# Altium PCB ESP-RC-Car.fixed.PcbDoc (part 1 of 2)
Units mm, origin at the board's own origin, x right, y up, seen from the top; angles counter-clockwise.
Board outline 100.25 x 60.25 mm, 4 copper layers (Top Layer, Int1 (Signal), Int2 (GND), Bottom Layer(PWR)), stack 1.586 mm thick; 110 components, 97 nets, 403 pads, 571 vias.
Unrouted connection lines stored in the file: 3.
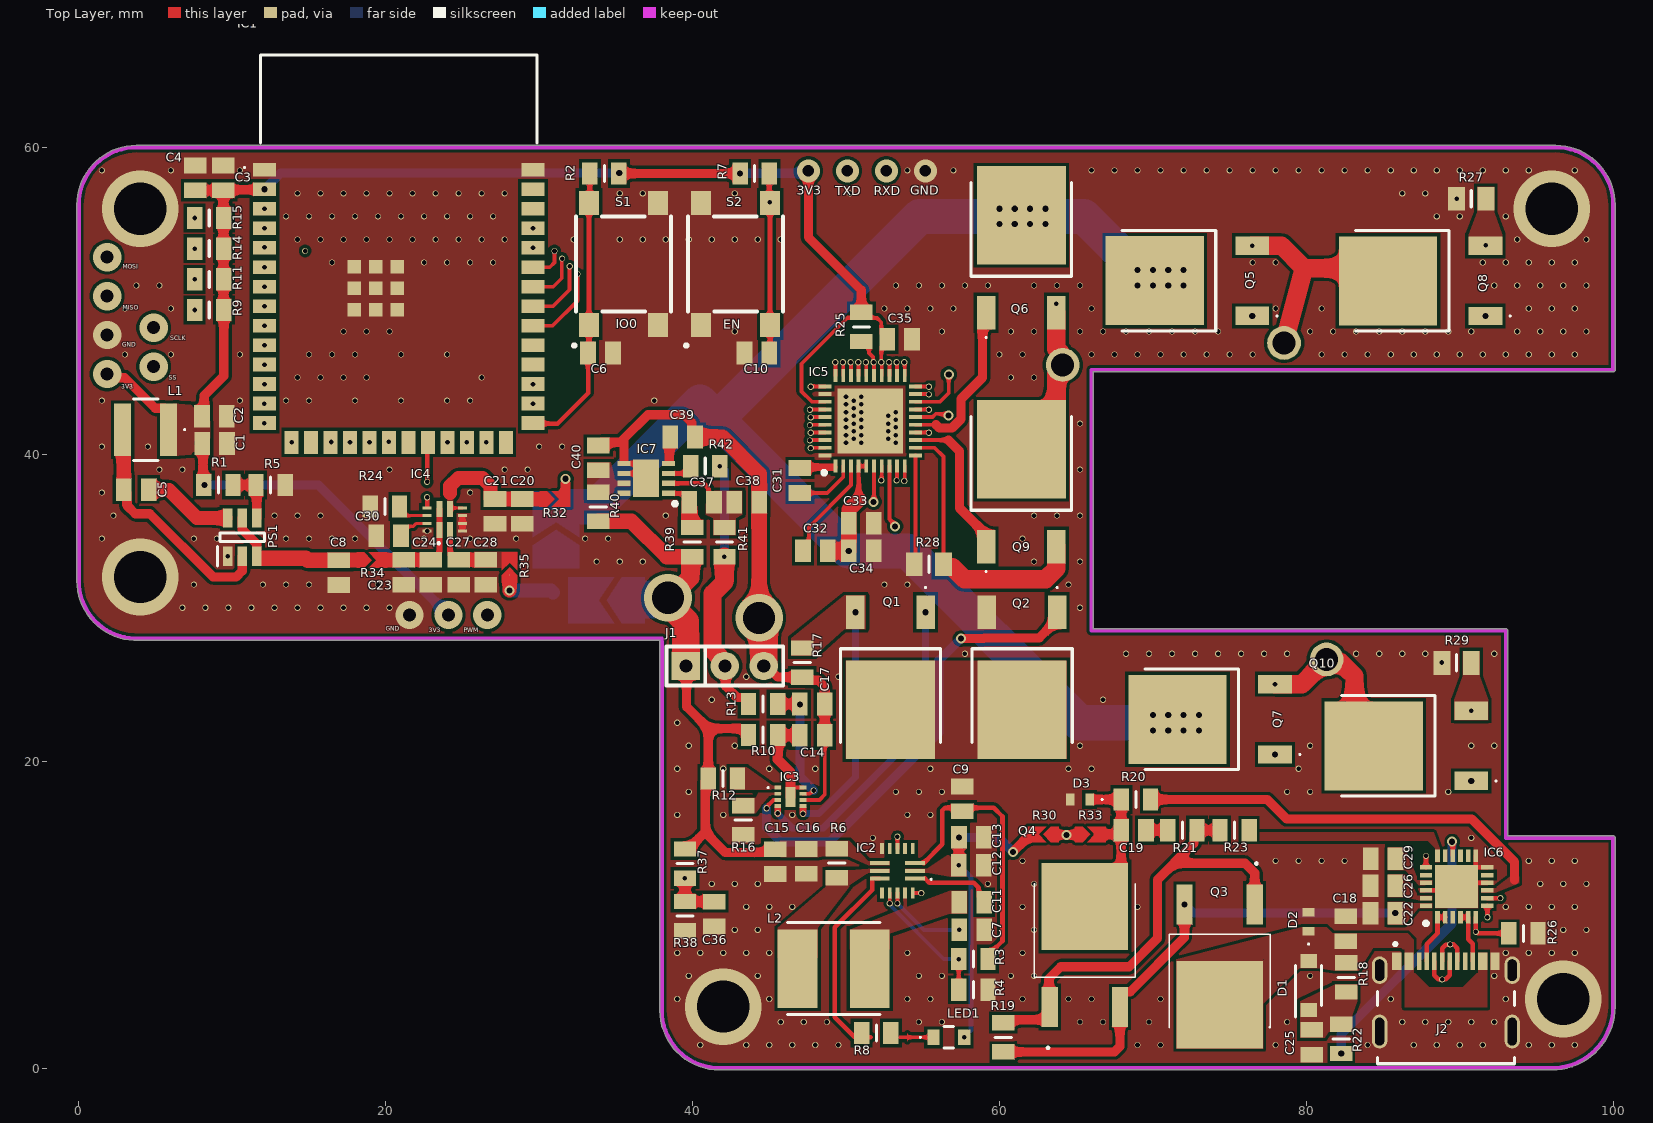
[diagram p0: Top Layer view]
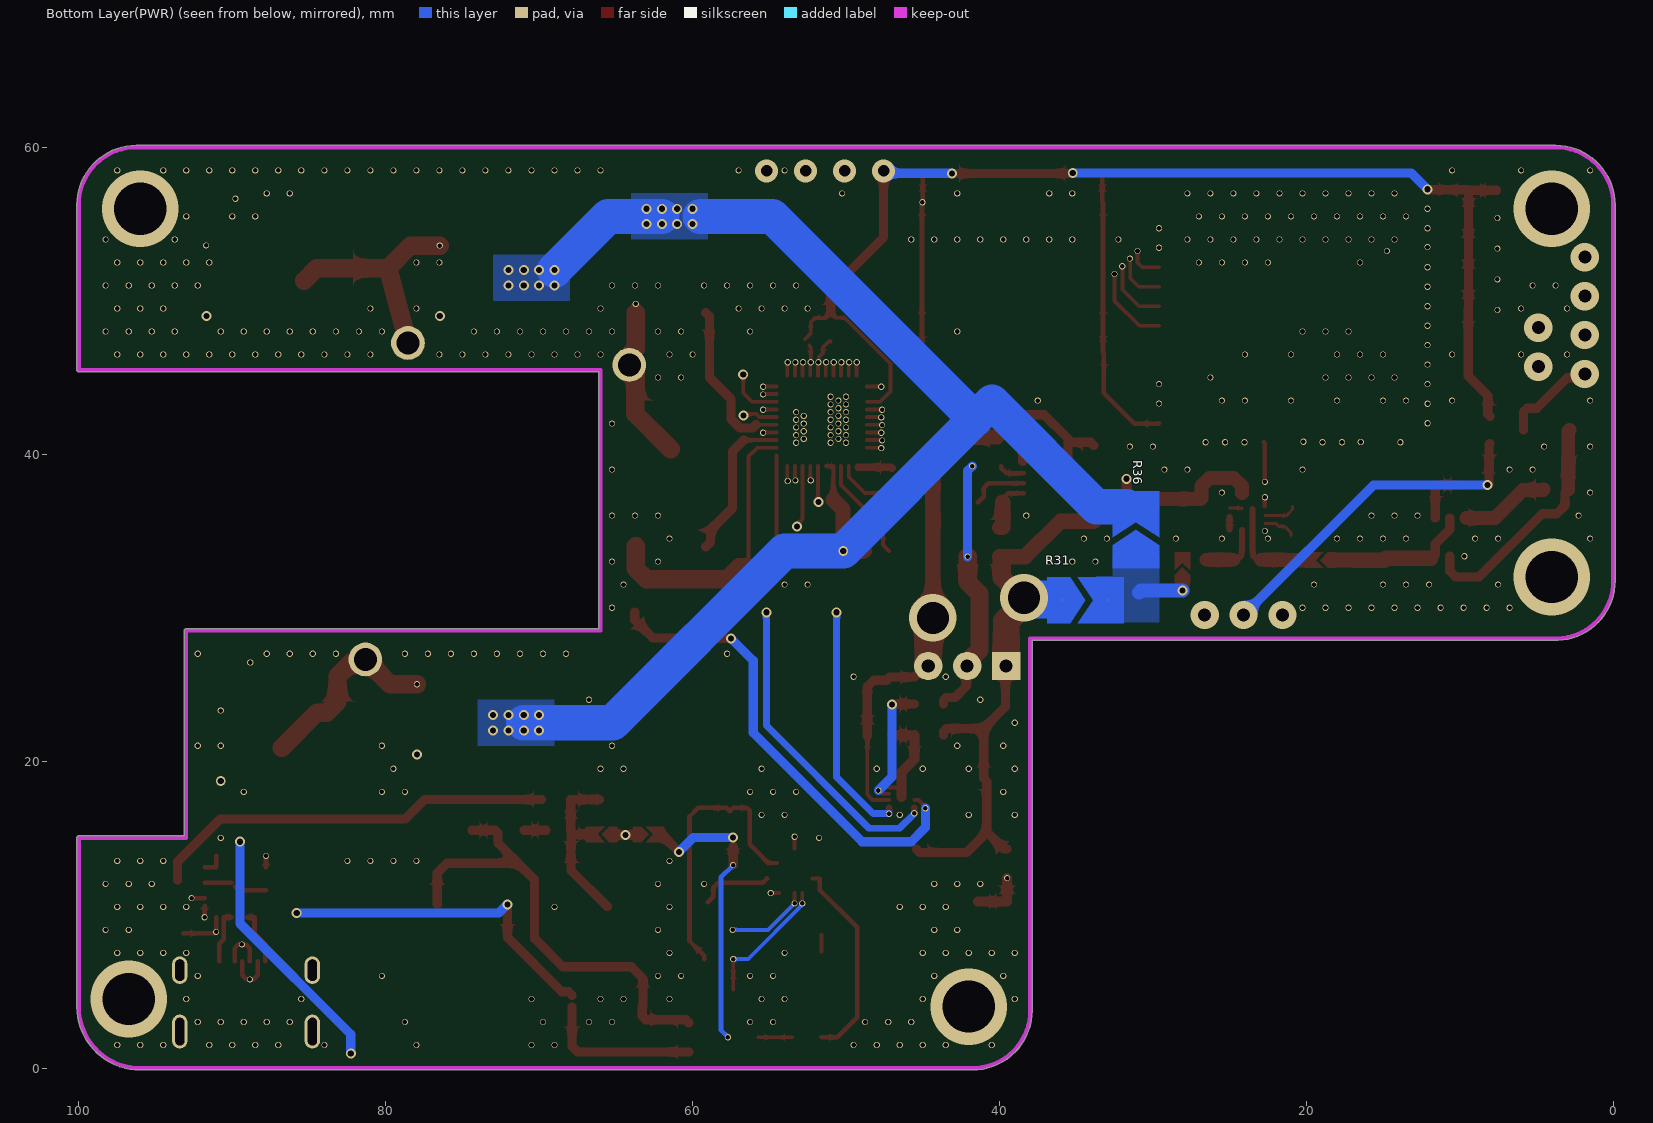
[diagram p1: Bottom Layer(PWR) view, seen from below]
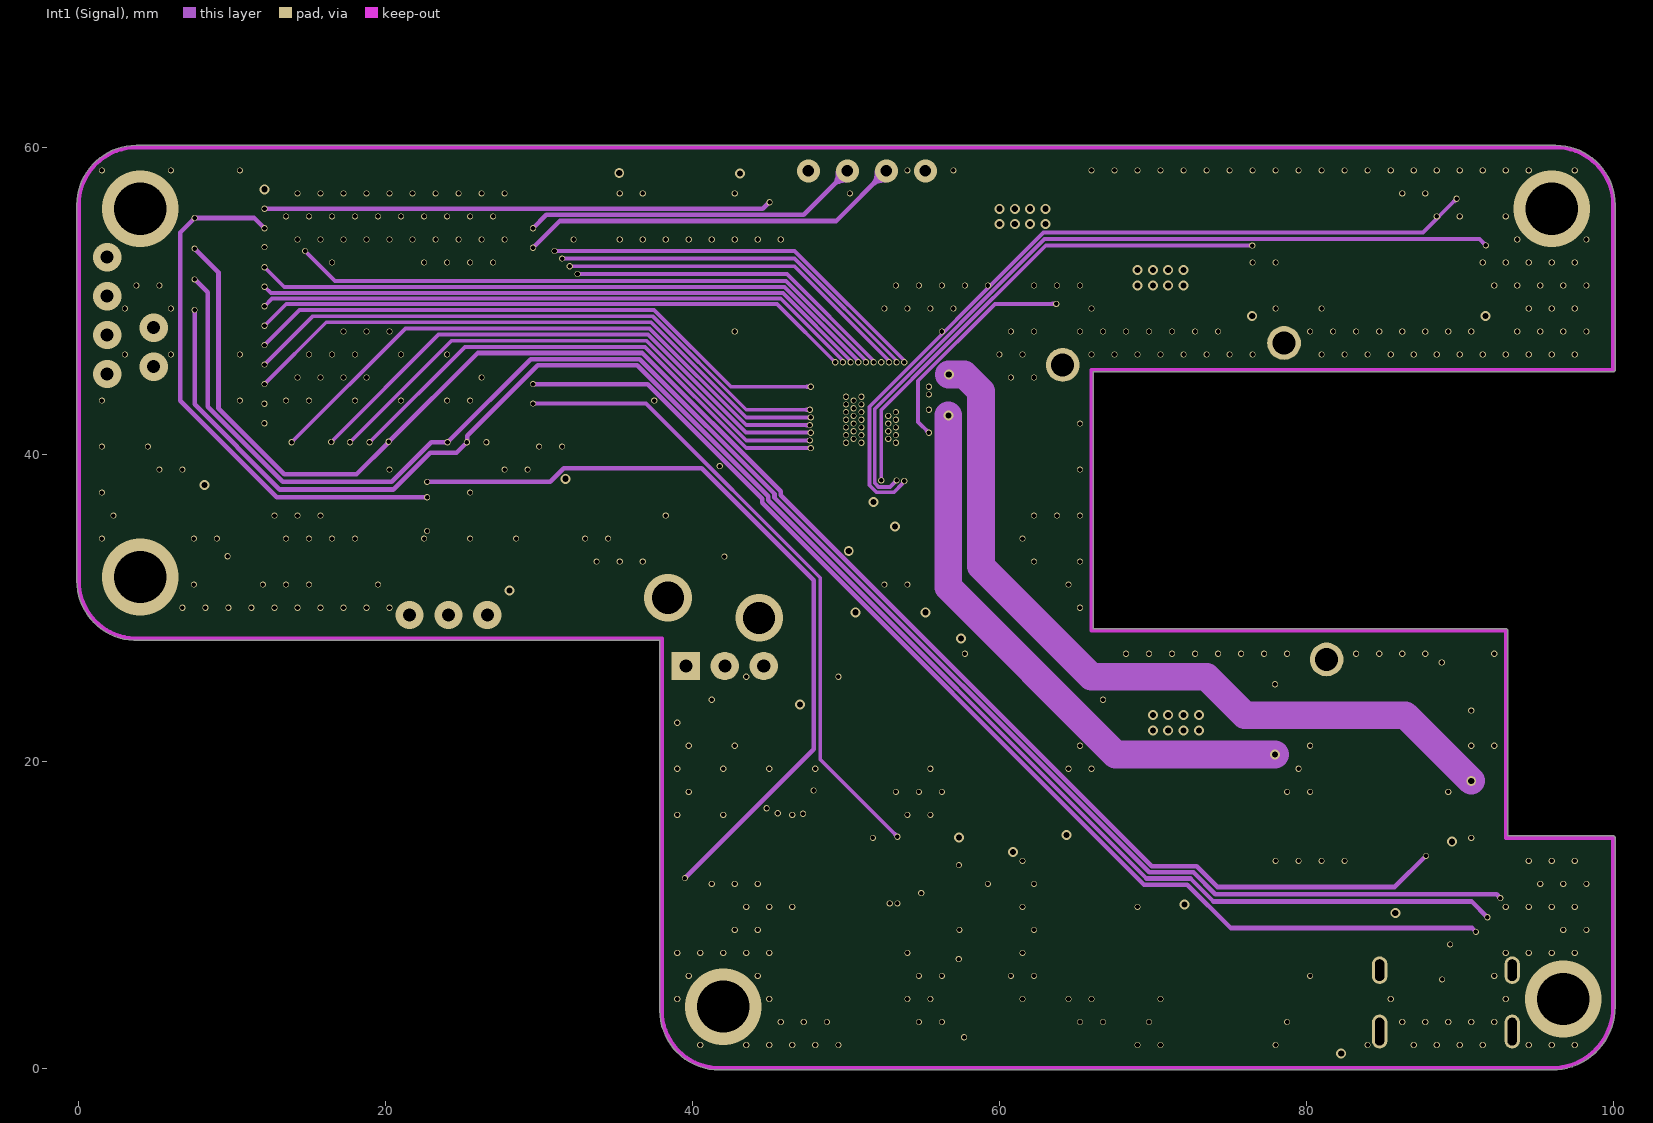
[diagram p2: Int1 (Signal)]
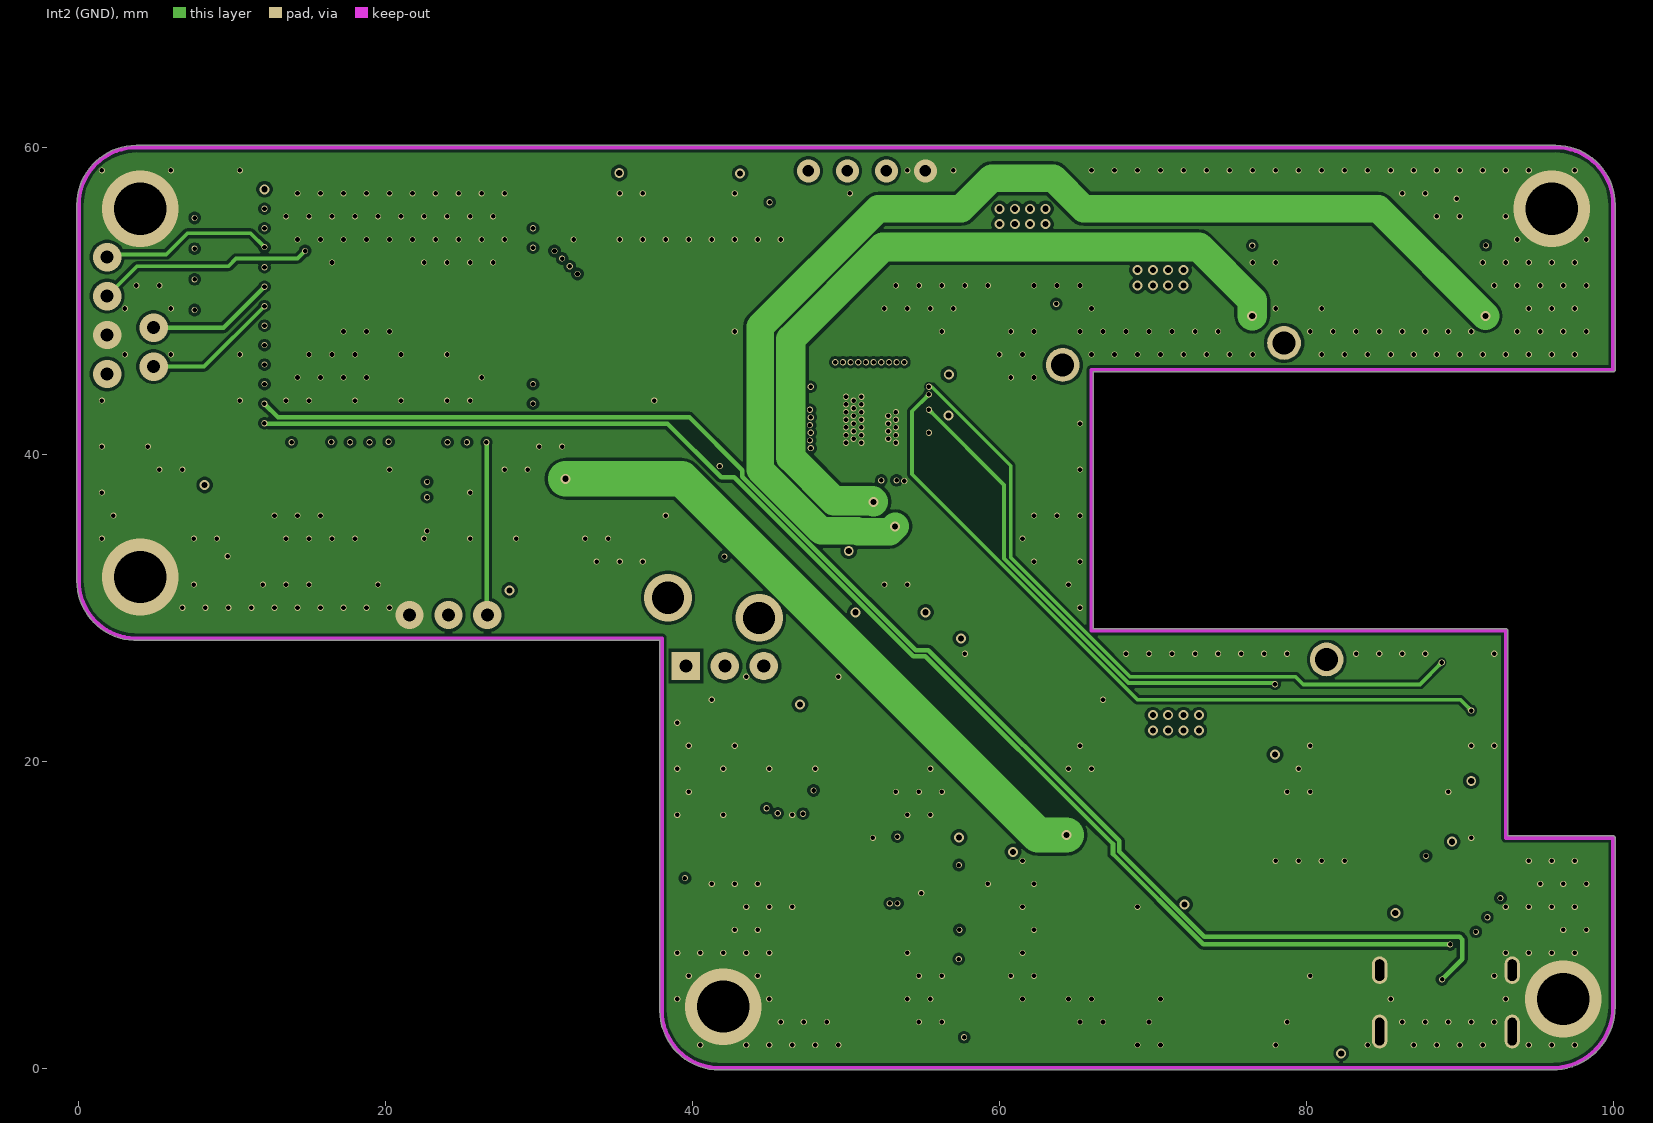
[diagram p3: Int2 (GND)]

## Layer stack, top to bottom
Top Solder: solder mask 0.0254, SM-001, Dk 4
Top Layer: signal copper 0.035
Dielectric 1: prepreg 0.2104, PP-017, Dk 4.3
Int1 (Signal): signal copper 0.0152
Dielectric 3: core 1.065, Core-039, Dk 4.8
Int2 (GND): signal copper 0.0152
Dielectric 5: prepreg 0.2104, PP-017, Dk 4.3
Bottom Layer(PWR): signal copper 0.035
Bottom Solder: solder mask 0.0254, SM-001, Dk 4

## Board outline
3.596,27.876 37.873,27.873 37.873,3.75 ccw(c41.75,3.75) 41.749,-0.127 41.75,-0.127 96,-0.127 ccw(c96,4) 100.127,4 100.127,5 100.127,15 ccw(c100,15) 100,15.127 93.127,15.127 93.127,28.5 ccw(c93,28.5) 93,28.627 66.127,28.627 66.127,45.373 100,45.373 ccw(c100,45.5) 100.127,45.5 100.127,56.25 ccw(c96.25,56.25) 96.25,60.127 3.75,60.127 ccw(c3.75,56.25) -0.127,56.25 -0.127,31.75 ccw(c3.75,31.75)

## Design rules (kind name [scope] priority, off if disabled: settings)
Clearance [All] p1: gap=0.2 ignorepadtopadclearanceinfootprint=TRUE except(0.1: Arc-Arc Arc-Track Arc-SMDPad Arc-THPad Arc-Via Arc-Text Arc-Hole Track-Track Track-SMDPad Track-THPad Track-Via Track-Text Track-Hole SMDPad-SMDPad SMDPad-THPad SMDPad-Via SMDPad-Text SMDPad-Hole THPad-THPad THPad-Via THPad-Text THPad-Hole Via-Via Via-Text Via-Hole Text-Text Text-Hole)
HoleSize [All] p1: absolutevalues=TRUE maxlimit=10 minlimit=0.025 maxpercent=80.000 minpercent=20.000
HoleToHoleClearance [All] p1: gap=0 allowstackedmicrovias=TRUE
PlaneConnect [All] p1: planeconnectstyle=Direct reliefexpansion=0.508 reliefentries=4 reliefconductorwidth=0.254 reliefairgap=0.254
PolygonConnect [All] p1: connectstyle=Direct reliefconductorwidth=0.254 reliefentries=4 polygonreliefangle="90 Angle" airgapwidth=0.254
RoutingVias [All] p1: holewidth=10 width=10 viastyle="Through Hole" minholewidth=0.3 minwidth=0.4 maxholewidth=10 maxwidth=10
SolderMaskExpansion [All] p1: expansion=0.102 istentingtop=FALSE
SupplyNets "Schematic Supply Nets_10" [InNet('VBATM')] p1: voltage=0.000
SupplyNets "Schematic Supply Nets_9" [InNet('VBAT-')] p2: voltage=0.000
SupplyNets "Schematic Supply Nets_8" [InNet('VBAT+')] p3: voltage=0.000
SupplyNets "Schematic Supply Nets_2" [InNet('VDRAIN')] p4: voltage=0.000
SupplyNets "Schematic Supply Nets_3" [InNet('VBATJ')] p5: voltage=0.000
SupplyNets "Schematic Supply Nets_7" [InNet('GND')] p6: voltage=0.000
SupplyNets "Schematic Supply Nets_6" [InNet('VMCU')] p7: voltage=0.000
SupplyNets "Schematic Supply Nets_5" [InNet('VBUS')] p8: voltage=0.000
SupplyNets "Schematic Supply Nets_4" [InNet('VSYS')] p9: voltage=0.000
SupplyNets "Schematic Supply Nets" [InNet('3V3')] p10: voltage=0.000
Width [All] p1: maxlimit=10 minlimit=0.1 preferedwidth=0.254
27 further rules are at their usual default settings.

## Components (designator, comment, footprint, x,y, rotation, side; value= is the part's Value field where it differs from the comment)
C1 "0805 22uF" CAPC2012X94N 8.85,40.7 r0 top
C2 "0805 22uF" CAPC2012X94N 8.835,42.475 r0 top
C3 "0805 10uF" CAPC2012X94N 9.4,58.01 r270 top
C4 "0805 100nF" CAPC2012X94N 7.6,58.01 r270 top
C5 "0805 0.1uF" CAPC2012X94N 3.74,37.7 r180 top
C6 "0805 10nF" CAPC2012X94N 34,46.6 r180 top
C7 "0805 1uF" CAPC2012X94N 58.2,9 r180 top
C8 "0805 2.2uF" CAPC2012X94N 16.95,32.285 r90 top
C9 "0805 1uF" CAPC2012X94N 57.575,17.535 r270 top
C10 "0805 10nF" CAPC2012X94N 44.19,46.6 r180 top
C11 "0805 10uF" CAPC2012X94N 58.19,10.8 r180 top
C12 "0805 10uF" CAPC2012X94N 58.165,13.225 r180 top
C13 "0805 10uF" CAPC2012X94N 58.175,15.025 r180 top
C14 "0805 0.1uF" CAPC2012X94N 47.8,21.675 r180 top
C15 "0805 10uF" CAPC2012X94N 45.4,13.45 r90 top
C16 "0805 10uF" CAPC2012X94N 47.4,13.46 r90 top
C17 "0805 0.1F" CAPC2012X94N 47.8,23.725 r180 top
C18 "0805 100nF" CAPC2012X94N 82.575,9.075 r90 top
C19 "0805 100nF" CAPC2012X94N 68.74,15.5 r0 top
C20 "0805 1uF" CAPC2012X94N 28.9,36.275 r270 top
C21 "0805 10uF" CAPC2012X94N 27.125,36.275 r270 top
C22 "0805 1uF" CAPC2012X94N 84.99,10.1 r0 top
C23 "0805 1uF" CAPC2012X94N 21.175,32.31 r270 top
C24 "0805 10uF" CAPC2012X94N 22.95,32.31 r270 top
C25 "0805 100nF" CAPC2012X94N 80.35,1.675 r270 top
C26 "0805 1uF" CAPC2012X94N 84.99,11.875 r180 top
C27 "0805 1uF" CAPC2012X94N 24.75,32.31 r270 top
C28 "0805 10uF" CAPC2012X94N 26.525,32.31 r270 top
C29 "0805 1uF" CAPC2012X94N 85,13.65 r0 top
C30 "0805 1uF" CAPC2012X94N 20.19,34.7 r0 top
C31 "0805 47nF" CAPC2012X94N 47,38.29 r90 top
C32 "0805 1uF" CAPC2012X94N 48.01,33.7 r180 top
C33 "0805 0.1uF" CAPC2012X94N 51,35.5 r180 top
C34 "0805 10uF" CAPC2012X94N 50.99,33.7 r180 top
C35 "0805 0.1uF" CAPC2012X94N 53.49,47.5 r180 top
C36 "0805 10nF" CAPC2012X94N 41.4,10.035 r90 top
C37 "0805 0.1uF" CAPC2012X94N 40.585,36.875 r180 top
C38 "0805 0.1 uF" CAPC2012X94N 43.535,36.875 r180 top
C39 "0805 0.33uF" CAPC2012X94N 39.35,41.125 r180 top
C40 "0805 0.1uF" CAPC2012X94N 33.85,39.76 r270 top
D1 "Schottky" SODFL3517X110N 80.15,5.375 r90 top
D2 "ESDA25P35-1U1M" ESDA25P351U1M 80.15,9.525 r270 top
D3 "ESDA25P35-1U1M" ESDA25P351U1M 65.25,17.5 r0 top
IC1 "ESP32-S3-WROOM-1-N8" ESP32S3WROOM1N8R2 20.85,53.28 r0 top
IC2 "MP2615AGQ-Z" MP2615AGQZ 53.35,12.85 r180 top
IC3 "S-82B2AAA-A8T2U" S82B2AAAA8T2U 46.375,17.675 r270 top
IC4 "TPS2121RUXT" TPS2121RUXT 23.85,35.75 r90 top
IC5 "DRV8323SRTAR" QFN50P600X600X80-41N-D 51.575,42.175 r90 top
IC6 "STUSB4500QTR" QFN50P400X400X100-25N-D 89.8,11.825 r90 top
IC7 "BQ29200DRBT" SON65P300X300X100-9N-D 36.975,38.425 r180 top
J1 "2s Battery" Sip-3 42.1,26.2 r0 top
J2 "USB4215-03-A_REVA" GCT_USB4215-03-A_REVA 89.1,2.375 r0 top
L1 "ASPI-4030S-5R6M-T" ASPI-4030S 4.35,41.6 r180 top
L2 "74404064068" INDPM6060X450N 49.2,6.475 r0 top
LED1 "150224BS73100" 150224BS73100 56.7,2 r0 top
PS1 "LMR51430XDDCR" SOT95P280X110-6N 10.65,34.6 r90 top
Q1 "IPD047N03LF2SATMA1" IPD047N03LF2SATMA1 52.9,25.465 r180 top
Q2 "IPD047N03LF2SATMA1" IPD047N03LF2SATMA1 61.475,25.465 r180 top
Q3 "DMP3007LK3-13" DMP3007LK313 74.35,5.675 r180 top
Q4 "DMP3007LK3-13" DMP3007LK313 65.564,8.96 r0 top
Q5 "IPD047N03LF2SATMA1" IPD047N03LF2SATMA1 72.24,51.31 r90 top
Q6 "IPD047N03LF2SATMA1" IPD047N03LF2SATMA1 61.425,53.46 r0 top
Q7 "IPD047N03LF2SATMA1" IPD047N03LF2SATMA1 73.725,22.725 r90 top
Q8 "IPD047N03LF2SATMA1" IPD047N03LF2SATMA1 87.44,51.3 r90 top
Q9 "IPD047N03LF2SATMA1" IPD047N03LF2SATMA1 61.425,38.21 r0 top
Q10 "IPD047N03LF2SATMA1" IPD047N03LF2SATMA1 86.515,21 r90 top
R1 "0805 22.1k" RESC2012X65N 9.1,38 r180 top
R2 "0805 22k" RESC2012X65N 34.25,58.3 r180 top
R3 "0805 10k" RESC2012X65N 58.3,7.1 r0 top
R4 "0805 10k" RESC2012X65N 58.3,5.1 r180 top
R5 "0805 100k" RESC2012X65N 12.5,38 r180 top
R6 "0805 50m" RESC2012X65N 49.4,13.35 r90 top
R7 "0805 22k" RESC2012X65N 44.05,58.3 r0 top
R8 "0805 1k" RESC2012X65N 51.975,2.275 r0 top
R9 "0805 22k" RESC2012X65N 8.5,49.4 r180 top
R10 "0805 100" RESC2012X65N 44.6,21.7 r180 top
R11 "0805 22k" RESC2012X65N 8.5,51.4 r180 top
R12 "0805 1k" RESC2012X65N 41.975,18.875 r180 top
R13 "0805 100" RESC2012X65N 44.6,23.725 r180 top
R14 "0805 22k" RESC2012X65N 8.5,53.4 r180 top
R15 "0805 22k" RESC2012X65N 8.5,55.4 r0 top
R16 "0805 1k" RESC2012X65N 43.3,16.15 r90 top
R17 "0805 4m" RESC2012X65N 47.15,26.425 r270 top
R18 "0805 470" RESC2012X65N 82.6,5.9 r90 top
R19 "0805 100k" RESC2012X65N 60.25,2 r270 top
R20 "0805 1k" RESC2012X65N 68.9,17.5 r180 top
R21 "0805 100" RESC2012X65N 71.925,15.5 r0 top
R22 "0805 1k" RESC2012X65N 82.275,1.9 r90 top
R23 "0805 22k" RESC2012X65N 75.325,15.5 r180 top
R24 "0805 22k" RESC2012X65N 19.95,36.6 r0 top
R25 "0805 24k" RESC2012X65N 51,48.3 r90 top
R26 "0805 100k" RESC2012X65N 94.15,8.775 r180 top
R27 "WSLP08057L000FEA18" RESC2013X58N 90.75,56.65 r0 top
R28 "WSLP08057L000FEA18" RESC2013X58N 55.4,32.825 r0 top
R29 "WSLP08057L000FEA18" RESC2013X58N 89.8,26.4 r0 top
R30 "Jumper" "Solder Jumper 5A" 63.85,15.725 r180 top
R31 "Jumper" "Solder Jumper 9A" 36.9,29 r180 bottom
R32 "Jumper" "Solder Jumper 5A" 30.025,36.575 r0 top
R33 "Jumper" "Solder Jumper 5A" 64.925,14.725 r0 top
R34 "Jumper" "Solder Jumper 5A" 18.1,32.6 r0 top
R35 "Jumper" "Solder Jumper 5A" 28.575,31.625 r90 top
R36 "Jumper" "Solder Jumper 9A" 29.6,32.575 r90 bottom
R37 "0805 1.8M" RESC2012X65N 39.5,13.325 r90 top
R38 "0805 1M" RESC2012X65N 39.5,9.9 r90 top
R39 "0805 160" RESC2012X65N 39.975,34.275 r270 top
R40 "0805 100" RESC2012X65N 33.85,36.575 r90 top
R41 "0805 260" RESC2012X65N 42.075,34.275 r270 top
R42 "0805 100" RESC2012X65N 40.825,39.225 r0 top
S1 "5x5mm Button" 430182070816 35.5,52.4 r90 top
S2 "5x5mm Button" 430182070816 42.8,52.4 r90 top

## Footprints (in the part's own frame and the unit in brackets; to place one, negate y for a bottom-side part, rotate by r counter-clockwise, add the part's x,y. Pads: shape width x height; smd on the part's side, far side on the other; paste and mask are expansions set on the pad)
150224BS73100 [mm]
  rect 0.8x1 smd: 1(-1,0) 2(1,0)
  silkscreen extent -1.9,-0.7 0.3,0.7, body extent -1.15,-0.7 1.15,0.7, height 1.31
430182070816 [mm]
  rect 1.55x1.3 smd: 1(-3.975,2.25) 2(-3.975,-2.25) 3(3.975,2.25) 4(3.975,-2.25)
  silkscreen extent -5.39,-3.1 3.1,3.29, body extent -4.5,-3.1 4.5,3.1, height 5
ASPI-4030S [mm]
  rect 1.1x3.4 smd: 1(-1.5,0) 2(1.5,0)
  silkscreen extent -2.6,-2 0.8,2, body extent -2,-2 2,2, height 3
CAPC2012X94N [mm]
  rect 1.02x1.47 smd: 1(-0.81,0) 2(0.81,0)
  body extent -1,-0.63 1,0.63, height 0.94
DMP3007LK313 [mm]
  rect 1.06x2.6 smd: 1(-2.286,-4.985) 3(2.286,-4.985)
  rect 5.632x5.7 smd: 2(-0.001,1.565)
  silkscreen extent -3.29,-7.7 3.29,3.05, body extent -3.3,-5.94 3.3,4.16, height 2.58
ESDA25P351U1M [mm]
  rect 0.55x0.8 smd: 1(0.625,0) 2(-0.625,0)
  silkscreen extent 1.4,-0.05 1.5,0.05, body extent -0.8,-0.5 0.8,0.5, height 0.57
ESP32S3WROOM1N8R2 [mm]
  rect 1.5x0.9 smd: 1(-8.75,5.26) 2(-8.75,3.99) 3(-8.75,2.72) 4(-8.75,1.45) 5(-8.75,0.18) 6(-8.75,-1.09) 7(-8.75,-2.36) 8(-8.75,-3.63) 9(-8.75,-4.9) 10(-8.75,-6.17) 11(-8.75,-7.44) 12(-8.75,-8.71) 13(-8.75,-9.98) 14(-8.75,-11.25) 27(8.75,-11.25) 28(8.75,-9.98) 29(8.75,-8.71) 30(8.75,-7.44) 31(8.75,-6.17) 32(8.75,-4.9) 33(8.75,-3.63) 34(8.75,-2.36) 35(8.75,-1.09) 36(8.75,0.18) 37(8.75,1.45) 38(8.75,2.72) 39(8.75,3.99) 40(8.75,5.26)
  rect 0.9x1.5 smd: 15(-6.985,-12.5) 16(-5.715,-12.5) 17(-4.445,-12.5) 18(-3.175,-12.5) 19(-1.905,-12.5) 20(-0.635,-12.5) 21(0.635,-12.5) 22(1.905,-12.5) 23(3.175,-12.5) 24(4.445,-12.5) 25(5.715,-12.5) 26(6.985,-12.5)
  rect 0.9x0.9 smd: 41(-1.5,-2.46) 42(-1.5,-1.06) 43(-2.9,-1.06) 44(-2.9,-2.46) 45(-2.9,-3.86) 46(-1.5,-3.86) 47(-0.1,-3.86) 48(-0.1,-2.46) 49(-0.1,-1.06)
  silkscreen extent -10.1,5.35 9,12.75, body extent -9,-12.75 9,12.75, height 2.7
GCT_USB4215-03-A_REVA [mm]
  rect 0.6x1.15 smd: A1_B12(-3.2,4.575) A4_B9(-2.4,4.575) B1_A12(3.2,4.575) B4_A9(2.4,4.575)
  rect 0.3x1.15 smd: A5(-1.25,4.575) A6(-0.25,4.575) A7(0.25,4.575) A8(1.25,4.575) B5(1.75,4.575) B6(0.75,4.575) B7(-0.75,4.575) B8(-1.75,4.575)
  oval 1x1.8 hole 0.6 slot 1.4 at 90 deg: SH1(-4.32,4) SH2(4.32,4)
  oval 1x2.2 hole 0.6 slot 1.8 at 90 deg: SH3(-4.32,0) SH4(4.32,0)
  silkscreen extent -4.47,-2.1 4.47,5.8, body extent -4.44,-2 4.5,4.75, height 3.28
INDPM6060X450N [mm]
  rect 2.6x5.1 smd: 1(-2.35,0) 2(2.35,0)
  silkscreen extent -3,-3 3,3, body extent -3,-3 3,3, height 4.5
IPD047N03LF2SATMA1 [mm]
  rect 1.2x2.2 smd: 1(-2.29,-4.235) 3(2.29,-4.235)
  rect 5.8x6.4 smd: 2(0,2.115)
  silkscreen extent -3.27,-5.9 3.27,4.24, body extent -3.3,-5.05 3.3,5.05, height 2.58
MP2615AGQZ [mm]
  rect 1.3x0.25 smd: 1(-1.15,0.5) 2(-1.15,0) 3(-1.15,-0.5) 9(1.15,-0.5) 10(1.15,0) 11(1.15,0.5)
  rect 0.25x0.7 smd: 4(-1,-1.45) 5(-0.5,-1.45) 6(0,-1.45) 7(0.5,-1.45) 8(1,-1.45) 12(1,1.45) 13(0.5,1.45) 14(0,1.45) 15(-0.5,1.45) 16(-1,1.45)
  silkscreen extent -2.25,0.5 -2.15,0.6, body extent -1.5,-1.5 1.5,1.5, height 1.1
QFN50P400X400X100-25N-D [mm]
  rect 0.8x0.3 smd: 1(-2,1.25) 2(-2,0.75) 3(-2,0.25) 4(-2,-0.25) 5(-2,-0.75) 6(-2,-1.25) 13(2,-1.25) 14(2,-0.75) 15(2,-0.25) 16(2,0.25) 17(2,0.75) 18(2,1.25)
  rect 0.3x0.8 smd: 7(-1.25,-2) 8(-0.75,-2) 9(-0.25,-2) 10(0.25,-2) 11(0.75,-2) 12(1.25,-2) 19(1.25,2) 20(0.75,2) 21(0.25,2) 22(-0.25,2) 23(-0.75,2) 24(-1.25,2)
  rect 2.8x2.8 smd: 25(0,0)
  silkscreen extent -2.52,1.88 -2.28,2.12, body extent -2.05,-2.05 2.05,2.05, height 1
QFN50P600X600X80-41N-D [mm]
  rect 0.85x0.25 smd: 1(-2.95,2.25) 2(-2.95,1.75) 3(-2.95,1.25) 4(-2.95,0.75) 5(-2.95,0.25) 6(-2.95,-0.25) 7(-2.95,-0.75) 8(-2.95,-1.25) 9(-2.95,-1.75) 10(-2.95,-2.25) 21(2.95,-2.25) 22(2.95,-1.75) 23(2.95,-1.25) 24(2.95,-0.75) 25(2.95,-0.25) 26(2.95,0.25) 27(2.95,0.75) 28(2.95,1.25) 29(2.95,1.75) 30(2.95,2.25)
  rect 0.25x0.85 smd: 11(-2.25,-2.95) 12(-1.75,-2.95) 13(-1.25,-2.95) 14(-0.75,-2.95) 15(-0.25,-2.95) 16(0.25,-2.95) 17(0.75,-2.95) 18(1.25,-2.95) 19(1.75,-2.95) 20(2.25,-2.95) 31(2.25,2.95) 32(1.75,2.95) 33(1.25,2.95) 34(0.75,2.95) 35(0.25,2.95) 36(-0.25,2.95) 37(-0.75,2.95) 38(-1.25,2.95) 39(-1.75,2.95) 40(-2.25,2.95)
  rect 4.25x4.25 smd: 41(0,0)
  silkscreen extent -3.5,2.87 -3.25,3.12, body extent -3,-3 3,3, height 1
RESC2012X65N [mm]
  rect 1x1.45 smd: 1(-0.95,0) 2(0.95,0)
  silkscreen extent 0,-0.53 0,0.53, body extent -0.77,-0.4 0.77,0.4, height 0.46
RESC2013X58N [mm]
  rect 1.1x1.55 smd: 1(-0.95,0) 2(0.95,0)
  silkscreen extent 0,-0.54 0,0.54, body extent -1.01,-0.64 1.01,0.64, height 0.36
S82B2AAAA8T2U [mm]
  rect 0.25x0.45 smd: 1(-0.6,-0.825) 2(-0.2,-0.825) 3(0.2,-0.825) 4(0.6,-0.825) 5(0.6,0.825) 6(0.2,0.825) 7(-0.2,0.825) 8(-0.6,0.825)
  rect 1.3x0.65 smd: 9(0,0)
  silkscreen extent -0.65,-1.5 -0.55,-1.4, body extent -0.8,-0.75 0.8,0.75, height 0.5
Sip-3 [mm]
  rect 1.85x1.85 hole 0.85: 1(-2.54,0)
  round 1.85 hole 0.85: 2(0,0) 3(2.54,0)
  silkscreen extent -3.81,-1.27 3.81,1.27
SODFL3517X110N [mm]
  rect 0.92x1.08 smd: 1(-1.6,0) 2(1.6,0)
  silkscreen extent -2.06,-0.85 1.3,0.85, body extent -1.75,-1.09 1.75,0.91, height 1.07
"Solder Jumper 5A" [mm]
  round 0.025 smd: 1(0.5,0.5) 2(1.5,0.5)
  Top Layer region: 0.8,0 1.3,0.5 0.8,1 2,1 2,0
  Top Layer region: 0,0 0,1 0.5,1 1,0.5 0.5,0
"Solder Jumper 9A" [mm]
  round 0.025 smd: 1(1,1.5) 2(4,1.5)
  Top Layer region: 0,0 0,3 1.5,3 2.5,1.5 1.5,0
  Top Layer region: 2,0 3,1.5 2,3 5,3 5,0
SON65P300X300X100-9N-D [mm]
  rect 0.85x0.35 smd: 1(-1.45,0.975) 2(-1.45,0.325) 3(-1.45,-0.325) 4(-1.45,-0.975) 5(1.45,-0.975) 6(1.45,-0.325) 7(1.45,0.325) 8(1.45,0.975)
  rect 1.7x2.45 smd: 9(0,0)
  silkscreen extent -2,1.53 -1.75,1.77, body extent -1.5,-1.5 1.5,1.5, height 0.77
SOT95P280X110-6N [mm]
  rect 1.25x0.6 smd: 1(-1.25,0.95) 2(-1.25,0) 3(-1.25,-0.95) 4(1.25,-0.95) 5(1.25,0) 6(1.25,0.95)
  silkscreen extent -1.88,-1.45 0.28,1.6, body extent -1.4,-1.45 1.4,1.45, height 0.97
TPS2121RUXT [mm]
  rect 1.05x0.4 smd: 1(-0.675,0.35) 2(-0.675,-0.35) 7(0.675,-0.35) 8(0.675,0.35)
  rect 0.2x0.6 smd: 3(-0.75,-1.15) 4(-0.25,-1.15) 5(0.25,-1.15) 6(0.75,-1.15) 9(0.75,1.15) 10(0.25,1.15) 11(-0.25,1.15) 12(-0.75,1.15)
  silkscreen extent -1.6,0.35 -1.5,0.45, body extent -1.05,-1.3 1.05,1.3, height 1

## Part data
C1 C2: library part 08055A150JAT2A, "Capacitor 25V", Manufacturer_Name="Kyocera AVX", Mouser Part Number=581-08055A150J, Arrow Part Number=08055A150JAT2A, Arrow Price/Stock=https://www.arrow.com/en/products/08055a150jat2a/avx?region=nac, Datasheet Link=https://componentsearchengine.com/Datasheets/1/06031A100FAT2A.pdf, Height=0.94mm, Manufacturer_Part_Number=08055A150JAT2A, Mouser Price/Stock=https://www.mouser.co.uk/ProductDetail/AVX/08055A150JAT2A?qs=pZVDklL%2Fs8hiEua37sqbaA%3D%3D
C3 C4 C5 C6 C7 C8 C9 C10 C11 C12 C13 C14 C15 C16 C17 C36 C37 C38 C39 C40: library part 08055A150JAT2A, "Capacitor", Manufacturer_Name="Kyocera AVX", Mouser Part Number=581-08055A150J, Arrow Part Number=08055A150JAT2A, Arrow Price/Stock=https://www.arrow.com/en/products/08055a150jat2a/avx?region=nac, Datasheet Link=https://componentsearchengine.com/Datasheets/1/06031A100FAT2A.pdf, Height=0.94mm, Manufacturer_Part_Number=08055A150JAT2A, Mouser Price/Stock=https://www.mouser.co.uk/ProductDetail/AVX/08055A150JAT2A?qs=pZVDklL%2Fs8hiEua37sqbaA%3D%3D
C18 C19 C20 C21 C22 C23 C24 C25 C26 C27 C28 C29 C30 C31 C34 C35: library part 08055A150JAT2A, "0805", Manufacturer_Name="Kyocera AVX", Mouser Part Number=581-08055A150J, Arrow Part Number=08055A150JAT2A, Arrow Price/Stock=https://www.arrow.com/en/products/08055a150jat2a/avx?region=nac, Datasheet Link=https://componentsearchengine.com/Datasheets/1/06031A100FAT2A.pdf, Height=0.94mm, Manufacturer_Part_Number=08055A150JAT2A, Mouser Price/Stock=https://www.mouser.co.uk/ProductDetail/AVX/08055A150JAT2A?qs=pZVDklL%2Fs8hiEua37sqbaA%3D%3D
C32: library part 08055A150JAT2A, "0805 16V X5R/X7R", Manufacturer_Name="Kyocera AVX", Mouser Part Number=581-08055A150J, Arrow Part Number=08055A150JAT2A, Arrow Price/Stock=https://www.arrow.com/en/products/08055a150jat2a/avx?region=nac, Datasheet Link=https://componentsearchengine.com/Datasheets/1/06031A100FAT2A.pdf, Height=0.94mm, Manufacturer_Part_Number=08055A150JAT2A, Mouser Price/Stock=https://www.mouser.co.uk/ProductDetail/AVX/08055A150JAT2A?qs=pZVDklL%2Fs8hiEua37sqbaA%3D%3D
C33: library part 08055A150JAT2A, "0805 VM rated", Manufacturer_Name="Kyocera AVX", Mouser Part Number=581-08055A150J, Arrow Part Number=08055A150JAT2A, Arrow Price/Stock=https://www.arrow.com/en/products/08055a150jat2a/avx?region=nac, Datasheet Link=https://componentsearchengine.com/Datasheets/1/06031A100FAT2A.pdf, Height=0.94mm, Manufacturer_Part_Number=08055A150JAT2A, Mouser Price/Stock=https://www.mouser.co.uk/ProductDetail/AVX/08055A150JAT2A?qs=pZVDklL%2Fs8hiEua37sqbaA%3D%3D
D1: library part PMEG3010ER, "Schottky Diode", Manufacturer_Name=Nexperia, Mouser Part Number=N/A, Datasheet Link=https://datasheet.datasheetarchive.com/originals/distributors/Datasheets-NXP/DSANXP010004875.pdf, Height=1.1mm, Manufacturer_Part_Number=PMEG3010ER, Mouser Price/Stock=https://www.mouser.co.uk/ProductDetail/Nexperia/PMEG3010ER?qs=vHuUswq2%252BswA%252BkrsHFmQzA%3D%3D
D2 D3: "TVS Diode (Uni-directional)", Manufacturer_Name=STMicroelectronics, Mouser Part Number=511-ESDA25P35-1U1M, Arrow Part Number=ESDA25P35-1U1M, Arrow Price/Stock=https://www.arrow.com/en/products/esda25p35-1u1m/stmicroelectronics?utm_currency=USD&region=europe, Datasheet Link=https://www.st.com/resource/en/datasheet/esda25p35-1u1m.pdf, Height=0.6mm, Manufacturer_Part_Number=ESDA25P35-1U1M, Mouser Price/Stock=https://www.mouser.co.uk/ProductDetail/STMicroelectronics/ESDA25P35-1U1M?qs=aVyJF2WnouQUWqgNP85ZrA%3D%3D
IC1: "Integrated Circuit", Manufacturer_Name="Espressif Systems", Mouser Part Number=356-ESP32-S3WROOM1N8, Datasheet Link=https://www.espressif.com/sites/default/files/documentation/esp32-s3-wroom-1_wroom-1u_datasheet_en.pdf, Height=3.25mm, Manufacturer_Part_Number=ESP32-S3-WROOM-1-N8, Mouser Price/Stock=https://www.mouser.co.uk/ProductDetail/Espressif-Systems/ESP32-S3-WROOM-1-N8?qs=Wj%2FVkw3K%252BMC1mq0KGPvoSQ%3D%3D
IC2: "Integrated Circuit", Manufacturer_Name="Monolithic Power Systems (MPS)", Mouser Part Number=946-MP2615AGQ-Z, Datasheet Link=https://www.monolithicpower.com/en/documentview/productdocument/index/version/2/document_type/Datasheet/lang/en/sku/MP2615AGQ-Z/document_id/1433/, Height=1mm, Manufacturer_Part_Number=MP2615AGQ-Z, Mouser Price/Stock=https://www.mouser.co.uk/ProductDetail/Monolithic-Power-Systems-MPS/MP2615AGQ-Z?qs=HiriQ40UqETtGEPnTGZTNQ%3D%3D
IC3: "Integrated Circuit", Manufacturer_Name="ABLIC Inc.", Mouser Part Number=628-S-82B2AAA-A8T2U, Datasheet Link=https://www.ablic.com/en/doc/datasheet/battery_protection/S82B2A_B_E.pdf, Height=0.4mm, Manufacturer_Part_Number=S-82B2AAA-A8T2U, Mouser Price/Stock=https://www.mouser.co.uk/ProductDetail/ABLIC/S-82B2AAA-A8T2U?qs=t7xnP681wgVKFpRRRjY2ng%3D%3D
IC4: "Integrated Circuit", Manufacturer_Name="Texas Instruments", Mouser Part Number=595-TPS2121RUXT, Arrow Part Number=TPS2121RUXT, Arrow Price/Stock=https://www.arrow.com/en/products/tps2121ruxt/texas-instruments?utm_currency=USD&region=nac, Datasheet Link=https://www.arrow.com/en/products/tps2121ruxt/texas-instruments, Height=1mm, Manufacturer_Part_Number=TPS2121RUXT, Mouser Price/Stock=https://www.mouser.co.uk/ProductDetail/Texas-Instruments/TPS2121RUXT?qs=l7cgNqFNU1i6abJCbO5ulQ%3D%3D
IC5: "Integrated Circuit", Manufacturer_Name="Texas Instruments", Mouser Part Number=595-DRV8323SRTAR, Arrow Part Number=DRV8323SRTAR, Arrow Price/Stock=https://www.arrow.com/en/products/drv8323srtar/texas-instruments?utm_currency=USD&region=nac, Datasheet Link=http://www.ti.com/lit/ds/symlink/drv8323.pdf, Height=0.8mm, Manufacturer_Part_Number=DRV8323SRTAR, Mouser Price/Stock=https://www.mouser.co.uk/ProductDetail/Texas-Instruments/DRV8323SRTAR?qs=u4fy%2FsgLU9P2gpPTX6mffg%3D%3D
IC6: "Integrated Circuit", Manufacturer_Name=STMicroelectronics, Mouser Part Number=511-STUSB4500QTR, Arrow Part Number=STUSB4500QTR, Arrow Price/Stock=https://www.arrow.com/en/products/stusb4500qtr/stmicroelectronics?utm_currency=USD&region=europe, Datasheet Link=https://www.st.com/resource/en/datasheet/stusb4500.pdf, Height=1mm, Manufacturer_Part_Number=STUSB4500QTR, Mouser Price/Stock=https://www.mouser.co.uk/ProductDetail/STMicroelectronics/STUSB4500QTR?qs=wUXugUrL1qyQbYMSzG1ujg%3D%3D
IC7: "Integrated Circuit", Manufacturer_Name="Texas Instruments", Mouser Part Number=595-BQ29200DRBT, Arrow Part Number=BQ29200DRBT, Arrow Price/Stock=https://www.arrow.com/en/products/bq29200drbt/texas-instruments?region=nac, Datasheet Link=http://www.ti.com/lit/ds/symlink/bq29200.pdf, Height=1mm, Manufacturer_Part_Number=BQ29200DRBT, Mouser Price/Stock=https://www.mouser.co.uk/ProductDetail/Texas-Instruments/BQ29200DRBT?qs=hEBn5lgDlCoXGMNHcYEAng%3D%3D
J1: library part CON3, "Stecker"
J2: "USB-C (USB TYPE-C) USB 2.0 Receptacle Connector 24 (16+8 Dummy) Position Surface Mount, Right Angle; Through Hole", Package=None, Check_prices=https://www.snapeda.com/parts/USB4215-03-A/Global+Connector+Technology/view-part/?ref=eda, MF="Global Connector Technology", MP=USB4215-03-A, SnapEDA_Link=https://www.snapeda.com/parts/USB4215-03-A/Global+Connector+Technology/view-part/?ref=snap
L1: "Inductor", Manufacturer_Name=ABRACON, Mouser Part Number=815-ASPI-4030S-5R6MT, Datasheet Link=https://abracon.com/Magnetics/power/ASPI-4030S.pdf, Height=3mm, Manufacturer_Part_Number=ASPI-4030S-5R6M-T, Mouser Price/Stock=https://www.mouser.co.uk/ProductDetail/ABRACON/ASPI-4030S-5R6M-T?qs=BLmuIjeT3qEs6vBfg%2FqMFg%3D%3D
L2: "Inductor", Manufacturer_Name="Wurth Elektronik", Mouser Part Number=710-74404064068, Datasheet Link=https://katalog.we-online.com/pbs/datasheet/74404064068.pdf, Height=4.5mm, Manufacturer_Part_Number=74404064068, Mouser Price/Stock=https://www.mouser.co.uk/ProductDetail/Wurth-Elektronik/74404064068?qs=Zt3UNFD9mQgMbZzq9pg0zg%3D%3D
LED1: "LED", Manufacturer_Name="Wurth Elektronik", Mouser Part Number=710-150224BS73100, Datasheet Link=https://www.we-online.com/components/products/datasheet/150224BS73100.pdf, Height=1.41mm, Manufacturer_Part_Number=150224BS73100, Mouser Price/Stock=https://www.mouser.co.uk/ProductDetail/Wurth-Elektronik/150224BS73100?qs=5aG0NVq1C4w%2FjMuF9nAPXA%3D%3D
PS1: "Power Supply 500kHz", Manufacturer_Name="Texas Instruments", Mouser Part Number=595-LMR51430XDDCR, Arrow Part Number=LMR51430XDDCR, Arrow Price/Stock=https://www.arrow.com/en/products/lmr51430xddcr/texas-instruments?utm_currency=USD&region=nac, Datasheet Link=https://www.ti.com/lit/ds/symlink/lmr51430.pdf?HQS=dis-mous-null-mousermode-dsf-pf-null-wwe&ts=1665567212982&ref_url=https%253A%252F%252Fwww.mouser.co.uk%252F, Height=1.1mm, Manufacturer_Part_Number=LMR51430XDDCR, Mouser Price/Stock=https://www.mouser.co.uk/ProductDetail/Texas-Instruments/LMR51430XDDCR?qs=vvQtp7zwQdP8miJIr5Aupg%3D%3D
Q1 Q2 Q5 Q6 Q7 Q8 Q9 Q10: "MOSFET (N-Channel)", Manufacturer_Name=Infineon, Mouser Part Number=726-IPD047N03LF2SATM, Datasheet Link=https://www.infineon.com/cms/en/product/power/mosfet/n-channel/ipd047n03lf2s/, Height=2.52mm, Manufacturer_Part_Number=IPD047N03LF2SATMA1, Mouser Price/Stock=https://www.mouser.co.uk/ProductDetail/Infineon-Technologies/IPD047N03LF2SATMA1?qs=3vio67wFuYq5Cj1%2F9iYlBQ%3D%3D
Q3 Q4: "MOSFET (P-Channel)", Manufacturer_Name="Diodes Incorporated", Mouser Part Number=621-DMP3007LK3-13, Datasheet Link=https://www.diodes.com/assets/Datasheets/DMP3007LK3.pdf, Height=2.39mm, Manufacturer_Part_Number=DMP3007LK3-13, Mouser Price/Stock=https://www.mouser.co.uk/ProductDetail/Diodes-Incorporated/DMP3007LK3-13?qs=17u8i%2FzlE8%252BiIxnE0yV1ZQ%3D%3D
R1 R3 R4 R5 R6 R8 R10 R12 R13 R16 R17 R39 R40 R41 R42: library part CPF0805B102RE1, "Resistor low tolerance", Manufacturer_Name="TE Connectivity", Datasheet Link=http://docs-europe.electrocomponents.com/webdocs/13d1/0900766b813d116f.pdf, Height=0.65mm, Manufacturer_Part_Number=CPF0805B102RE1
R2 R7 R9 R11 R14 R15 R18 R19 R20 R21 R22 R23 R24 R25 R26 R30 R31 R32 R33 R34 R35 R36 R37 R38: library part CPF0805B102RE1, "Resistor", Manufacturer_Name="TE Connectivity", Datasheet Link=http://docs-europe.electrocomponents.com/webdocs/13d1/0900766b813d116f.pdf, Height=0.65mm, Manufacturer_Part_Number=CPF0805B102RE1
R27 R28 R29: "Resistor", Manufacturer_Name=Vishay, Mouser Part Number=71-WSLP08057L000FEA1, Arrow Part Number=WSLP08057L000FEA18, Arrow Price/Stock=https://www.arrow.com/en/products/wslp08057l000fea18/vishay?region=nac, Datasheet Link=https://www.vishay.com/docs/30298/wslp18.pdf, Height=0.584mm, Manufacturer_Part_Number=WSLP08057L000FEA18, Mouser Price/Stock=https://www.mouser.co.uk/ProductDetail/Vishay-Dale/WSLP08057L000FEA18?qs=yAJ577jGV70jP0rOIAdIIA%3D%3D
S1 S2: library part 430182050816, "Switch", Manufacturer_Name="Wurth Elektronik", Mouser Part Number=710-430182050816, Datasheet Link=http://katalog.we-online.de/em/datasheet/4301x2xxx8x6.pdf, Manufacturer_Part_Number=430182050816, Mouser Price/Stock=https://www.mouser.co.uk/ProductDetail/Wurth-Elektronik/430182050816?qs=wr8lucFkNMUyle0jQPgWGw%3D%3D

## Free pads (board coordinates)
  round 2.2 hole 1.5: 6(64.125,45.825) 6(78.55,47.254) 6(81.325,26.625)

## Via types
v1: diameter 0.4, hole 0.3, Top Layer to Bottom Layer(PWR), tented both sides, 500 vias
v2: diameter 0.65, hole 0.4, Top Layer to Bottom Layer(PWR), tented both sides, 49 vias
v3: diameter 1.85, hole 0.85, Top Layer to Bottom Layer(PWR), 9 vias
v4: diameter 5, hole 3.4, Top Layer to Bottom Layer(PWR), 5 vias
v5: diameter 1.5, hole 0.75, Top Layer to Bottom Layer(PWR), 4 vias
v6: diameter 3.1, hole 2.1, Top Layer to Bottom Layer(PWR), 2 vias
v7: diameter 0.65, hole 0.4, Top Layer to Bottom Layer(PWR), 1 vias
v8: diameter 0.4/0.4/0.4/0.4 (per signal layer), hole 0.3, Top Layer to Bottom Layer(PWR), tented both sides, 1 vias

## Nets (pads, with @x,y where several pads share a name; then routed paths per layer and width w, separated by ;. In a path a pad name is that pad's centre, name@x,y a point inside that pad or via, vN(x,y) a via of type N, cw(c..) or ccw(c..) an arc to the next point about the centre after c; other vN are vias at no path point)
3V3: C1.1 C2.1 C3.2 C4.2 C35.2 IC1.2 IC5.24 IC5.33 L1.1 R1.2 R2.1 R7.1 R9.1 R11.1 R14.1 R15.2 R25.2 | length 108.5
  Top Layer w0.25: IC5.33@48.625,43.425 47.775,43.425 47.1,44.1 47.1,45.9 50.097,48.897 50.647,48.897 R25.2@51,49.25 51.375,48.875 52.025,48.875 52.3,48.6 52.3,48.4 52.302,48.398 52.302,47.878 C35.2@52.68,47.5 ; v1(52.3,46) 52.3,47 C35.2@52.4,47.1 ; IC5.24@52.325,45.125 v1@52.325,46
  Top Layer w0.6: v3(1.85,45.23) 2.089,44.991 2.984,44.991 4.975,43 5.6,43 5.85,42.75 L1.1@5.85,41.6 ; C4.2@7.6,57.2 C3.2@9.4,57.2 ; C2.1@8.025,42.475 8.175,42.625 8.175,43.825 9.45,45.1 9.45,49.525 9.425,49.55 9.425,57.175 C3.2@9.4,57.2 ; C1.1@8.032,40.707 C1.1@8.04,40.7 8.095,40.645 8.095,38.055 R1.2@8.15,38 ; v2(12.1,57.27) 12.065,57.235 9.435,57.235 C3.2@9.4,57.2 ; R2.1@35.2,58.3 v2(43.1,58.3) ; v5(47.548,58.47) 47.548,54.152 51,50.7 R25.2@51,49.25
  Bottom Layer(PWR) w0.6: v2(8.2,38) 15.615,38 v3(24.09,29.525) ; v2(12.1,57.27) 13.161,58.331 v2(35.222,58.331) ; v2(43.1,58.3) 43.11,58.31 47.41,58.31 v5@47.5,58.4
ALERT: IC1.20 IC6.19 R14.2 | length 111
  Top Layer w0.3: IC6.19@87.8,13.075 v1(87.8,13.825)
  Int1 (Signal) w0.3: v1(7.55,53.4) 9.1,51.85 9.1,43 13.4,38.7 18.1,38.7 20.193,40.793 v1(20.193,40.816) ; v1@20.205,40.805 26,46.6 36.733,46.6 45.741,37.593 45.741,37.326 69.917,13.15 72.85,13.15 74.2,11.8 85.775,11.8 v1(87.8,13.825)
CAL: IC1.10 IC5.31 | length 39.5
  Top Layer w0.25: v1@47.7,44.425 IC5.31@48.625,44.425
  Int1 (Signal) w0.25: v1(12.1,47.11) 14.39,49.4 37.495,49.4 42.495,44.4 v1(47.7,44.4)
CC1: IC6.1 IC6.2 J2.A5 | length 3.7
  Top Layer w0.3: J2.A5@87.85,6.95 87.85,8.075 88.55,8.775 IC6.1@88.55,9.825 IC6.2@89.05,9.825
CC2: IC6.4 IC6.5 J2.B5 | length 3.5
  Top Layer w0.3: IC6.4@90.05,9.825 IC6.5@90.55,9.825 90.55,8.4 90.85,8.1 J2.B5@90.85,6.95
CHARGE: IC1.28 IC2.6 | length 43.2
  Top Layer w0.25: IC2.6@53.35,14.3 v1(53.35,15.075)
  Int1 (Signal) w0.25: v1(29.6,43.3) 36.975,43.3 48.325,31.95 48.325,20.1 v1(53.35,15.075)
DN: IC1.13 J2.A7 J2.B7 | length 99.4
  Top Layer w0.3: J2.B7@88.35,6.95 88.35,6.05 88.606,5.794 88.831,5.794 v1(88.85,5.775) 88.869,5.794 89.094,5.794 89.35,6.05 J2.A7@89.35,6.95
  Int2 (GND) w0.3: v1(12.09,43.293) 12.983,42.4 39.802,42.4 43.25,38.952 43.25,38.524 54.545,27.228 55.372,27.228 67.8,14.8 67.8,14.111 73.361,8.55 89.994,8.55 90.17,8.374 90.17,7.095 v1(88.85,5.775)
DP: IC1.14 J2.A6 J2.B6 | length 94.5
  Top Layer w0.3: J2.A6@88.85,6.95 88.85,7.8 89.087,8.037 89.35,8.037 v1(89.369,8.056) 89.594,8.056 89.85,7.8 J2.B6@89.85,6.95
  Int1 (Signal) w0.3: v1(12.09,42.023) v1@12.109,42.004
  Int2 (GND) w0.3: 12.3,42 38.364,42 41.864,38.5 42.708,38.5 54.379,26.828 55.172,26.828 67.4,14.6 67.4,13.945 73.289,8.056 v1(89.369,8.056)
EN: C10.1 IC1.3 R7.2 S2.2 S2.4 | length 44.8
  Top Layer w0.3: C10.1@45,46.6 45.05,46.65 S2.2@45.05,48.425 S2.4@45.05,56.375 ; S2.4@45,56.425 R7.2@45,58.3
  Int1 (Signal) w0.3: v1(12.1,56) 44.573,56 44.998,56.425 v1(45.025,56.425)
ENABLE: IC1.9 IC5.30 | length 40.2
  Top Layer w0.25: IC5.30@49.325,45.125 v1@49.325,46
  Int1 (Signal) w0.25: v1(12.1,48.38) 13.52,49.8 45.5,49.8 v1(49.3,46)
GHA: IC5.6 Q5.1 | length 51.6
  Top Layer w0.25: v2(51.8,36.9) 51.825,36.925 IC5.6@51.825,39.225
  Int2 (GND) w1.9: v2(51.8,36.9) 51.725,36.975 49.225,36.975 46.4,39.8 46.4,47.5 52.4,53.5 73,53.5 76.475,50.025 v2(76.475,49.02)
GHB: IC5.15 Q6.1 | length 10.9
  Top Layer w0.25: IC5.15@54.525,41.925 55.875,41.925
  Top Layer w0.6: 55.875,41.925 56.09,41.71 56.91,41.71 57.5,42.3 57.5,43.6 58.9,45 58.9,48.99 Q6.1@59.135,49.225
GHC: IC5.16 Q7.1 | length 39.3
  Top Layer w0.25: IC5.16@54.525,42.425 55.633,42.425 55.851,42.644 56.058,42.644 56.089,42.613 56.6,42.613 v2(56.676,42.537)
  Int1 (Signal) w1.8: v2(56.676,42.537) 56.676,31.324 67.565,20.435 v2(77.96,20.435)
GLA: IC5.8 Q8.1 | length 79
  Top Layer w0.25: IC5.8@52.825,39.225 52.825,35.783 53.2,35.408 v2(53.2,35.3)
  Int2 (GND) w1.8: v2(53.2,35.3) 52.85,34.95 50.804,34.95 50.729,35.025 48.375,35.025 44.4,39 44.4,48.3 52.1,56 57.5,56 59.5,58 63.5,58 65.5,56 84.685,56 v2(91.675,49.01)
GLB: IC5.13 Q9.1 | length 10.1
  Top Layer w0.25: IC5.13@54.525,40.925 56.675,40.925
  Top Layer w0.6: 56.675,40.925 57.4,40.2 57.4,36.5 58.835,35.065 58.835,34.275 Q9.1@59.135,33.975
GLC: IC5.18 Q10.1 | length 55.3
  Top Layer w0.25: IC5.18@54.525,43.425 56.125,43.425 56.7,44 v2(56.7,45.2)
  Int1 (Signal) w1.8: v2(56.7,45.2) 57.7,45.2 58.8,44.1 58.8,32.7 66,25.5 73.5,25.5 76,23 86.46,23 v2(90.75,18.71)